# Altium PCB PCB1.PcbDoc
Units mm, origin at the board's own origin, x right, y up, seen from the top; angles counter-clockwise.
Board outline 85 x 63 mm, 2 copper layers (Top Layer, Bottom Layer), stack 0.98 mm thick; 56 components, 26 nets, 148 pads, 24 vias.
Unrouted connection lines stored in the file: 4.
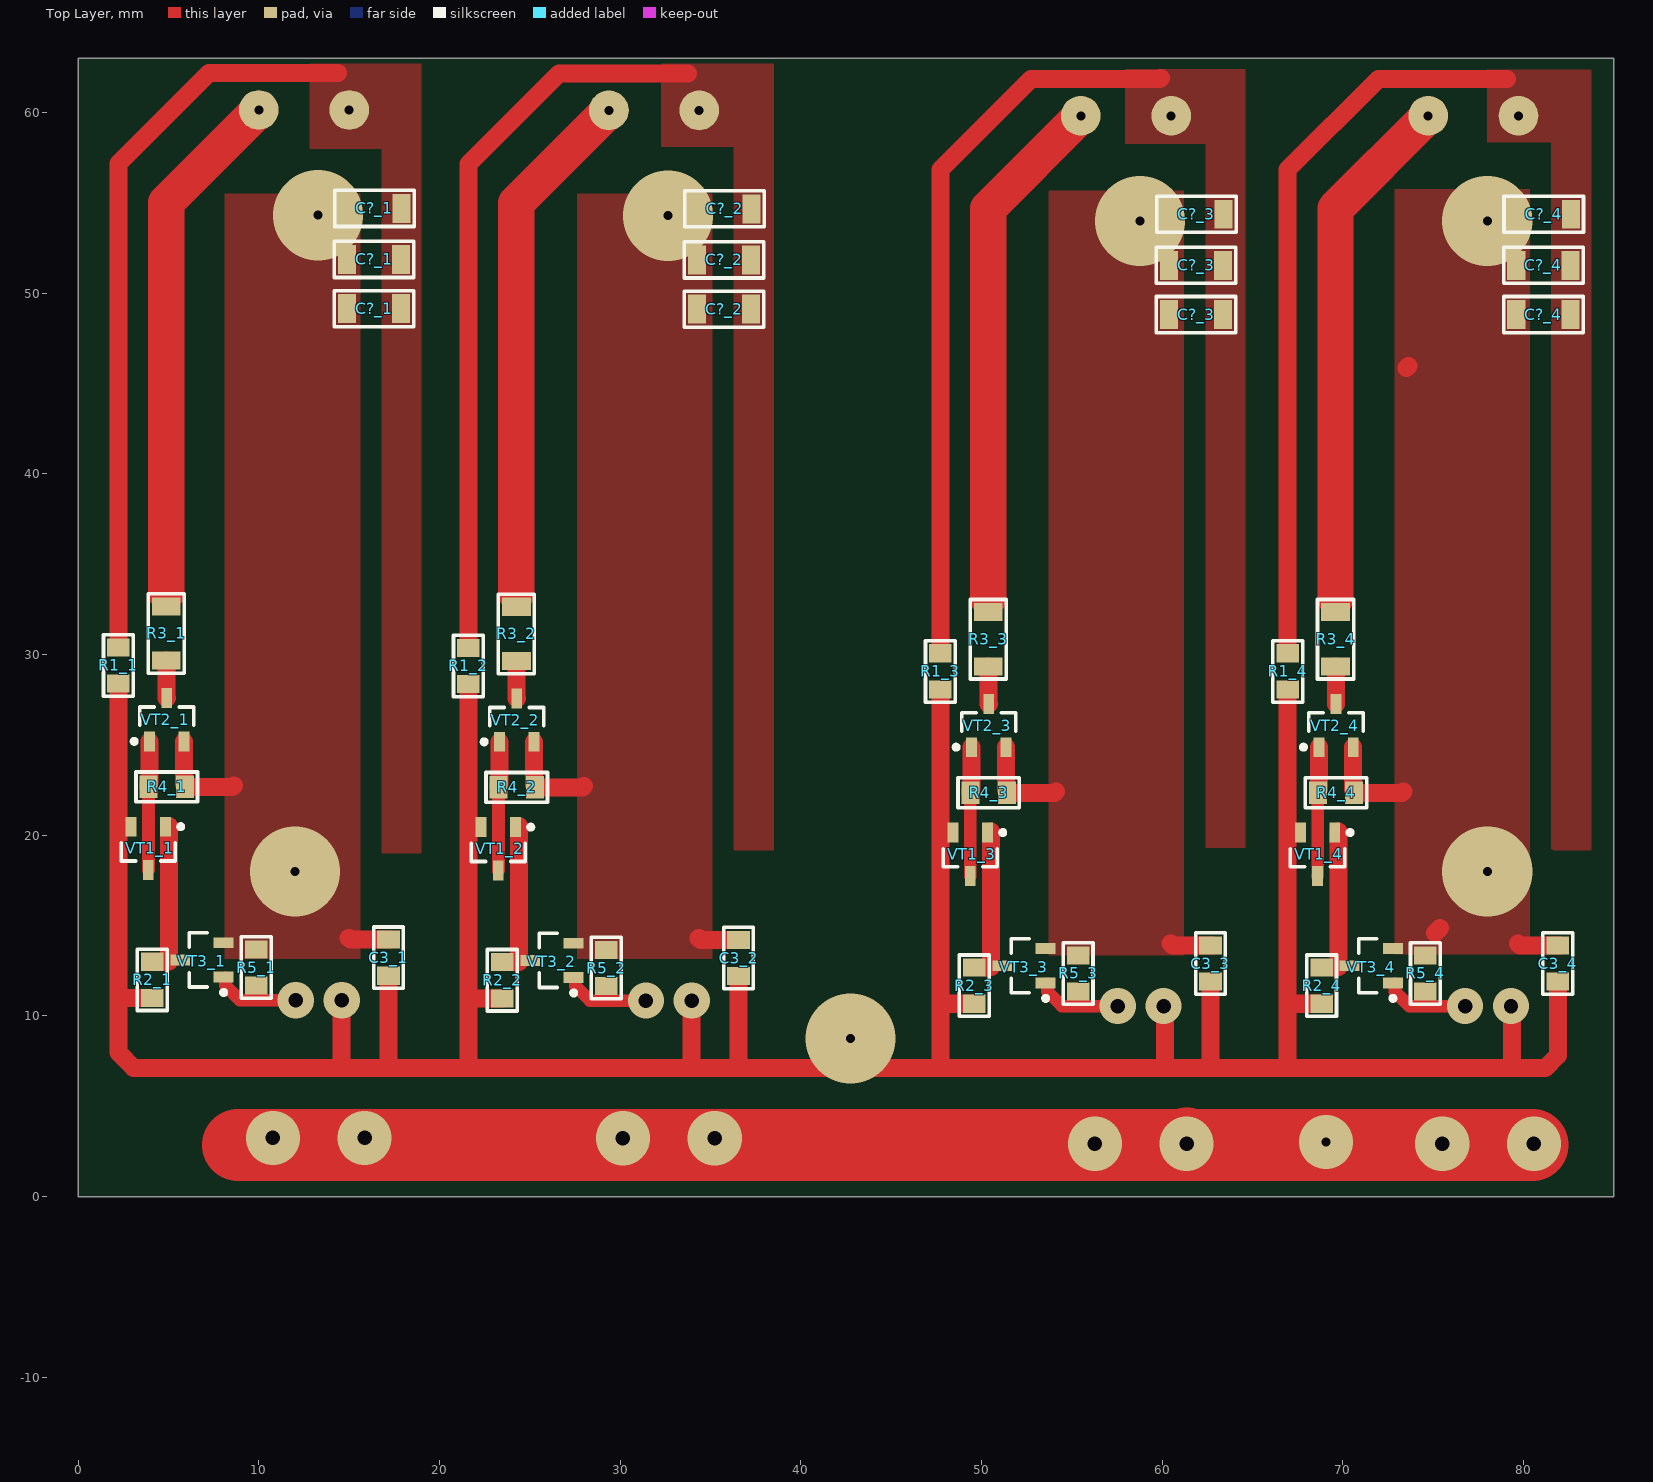
[diagram p0: Top Layer view]
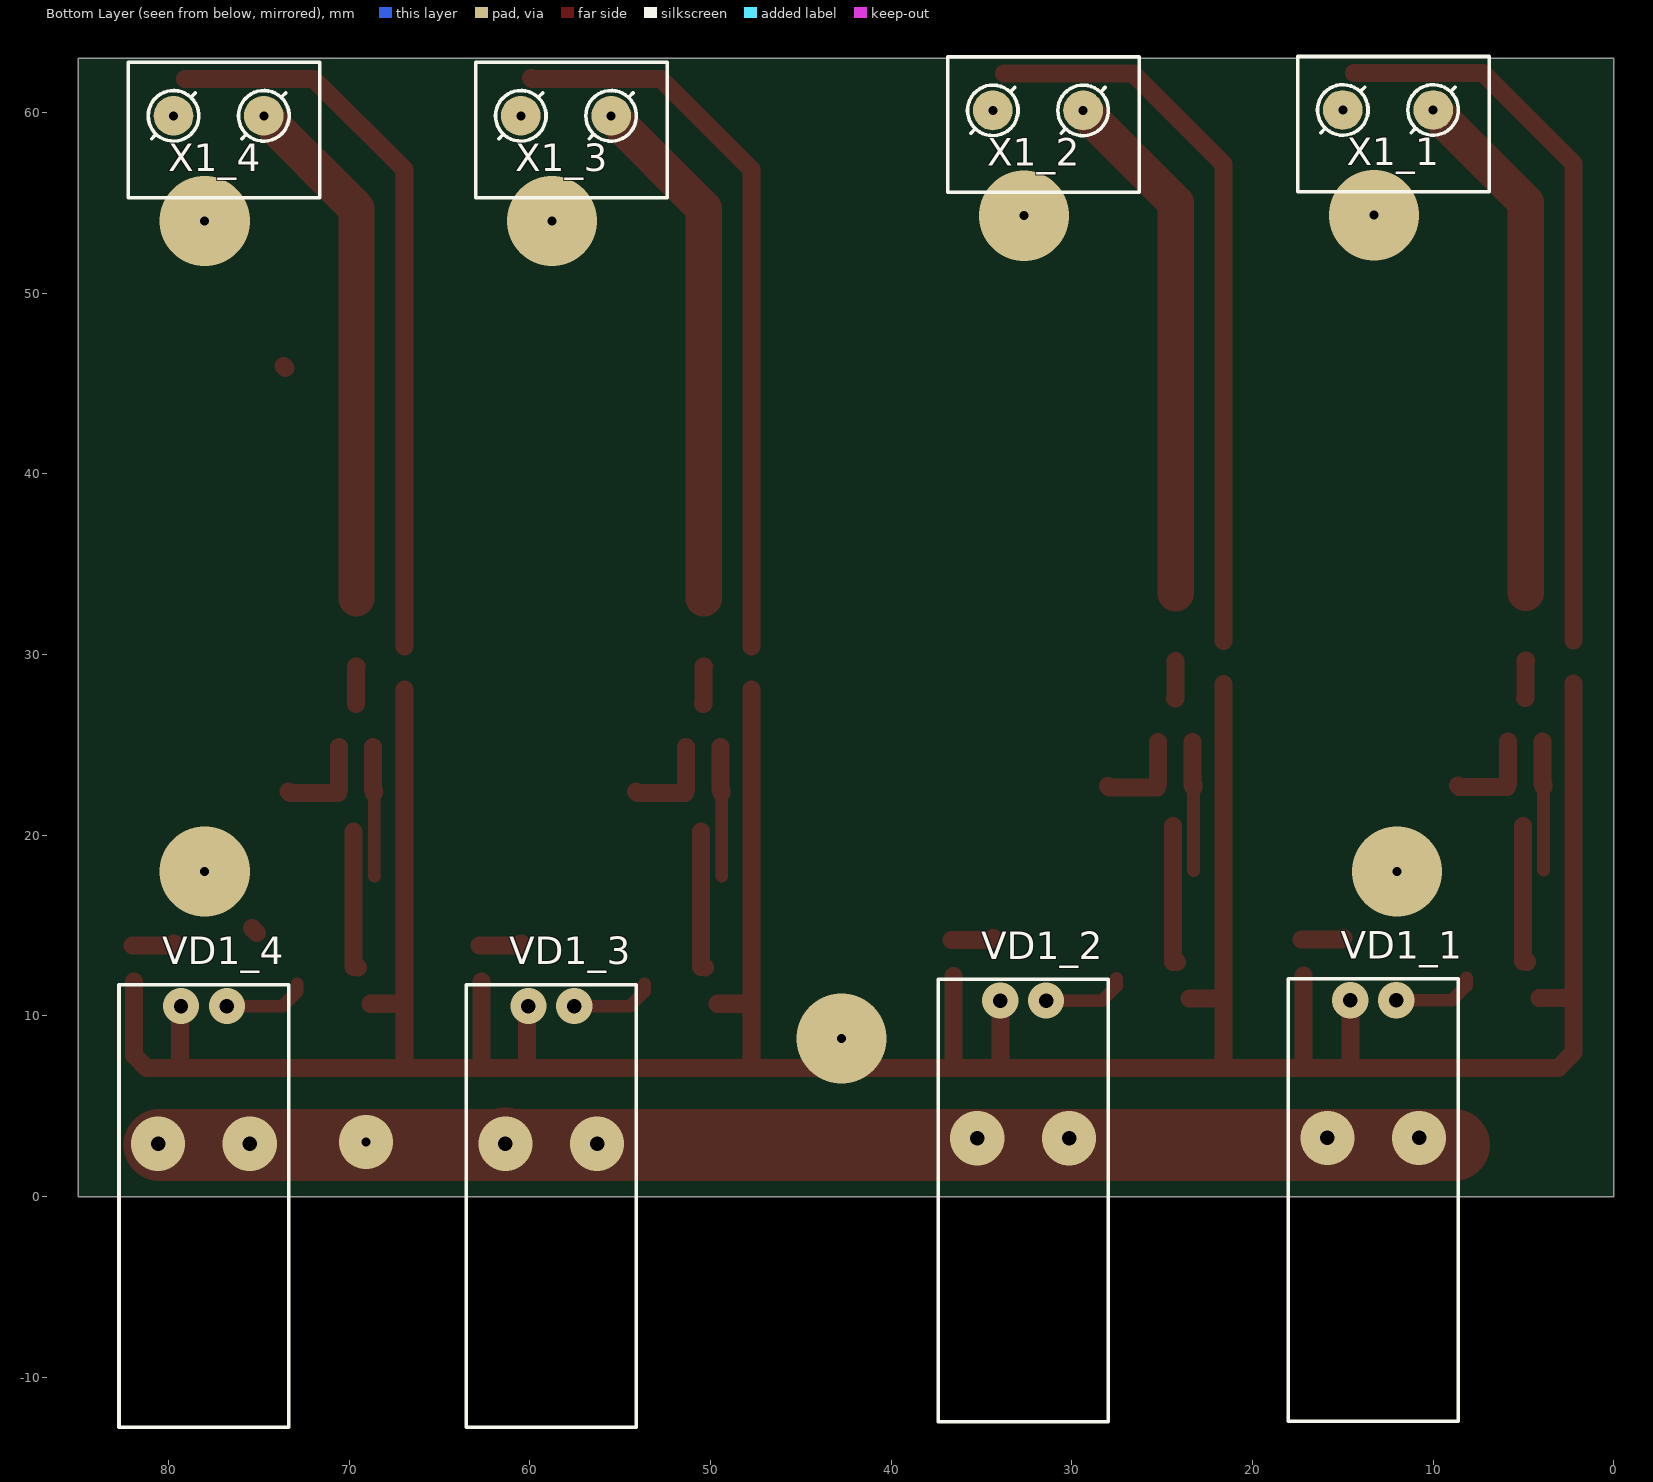
[diagram p1: Bottom Layer view, seen from below]
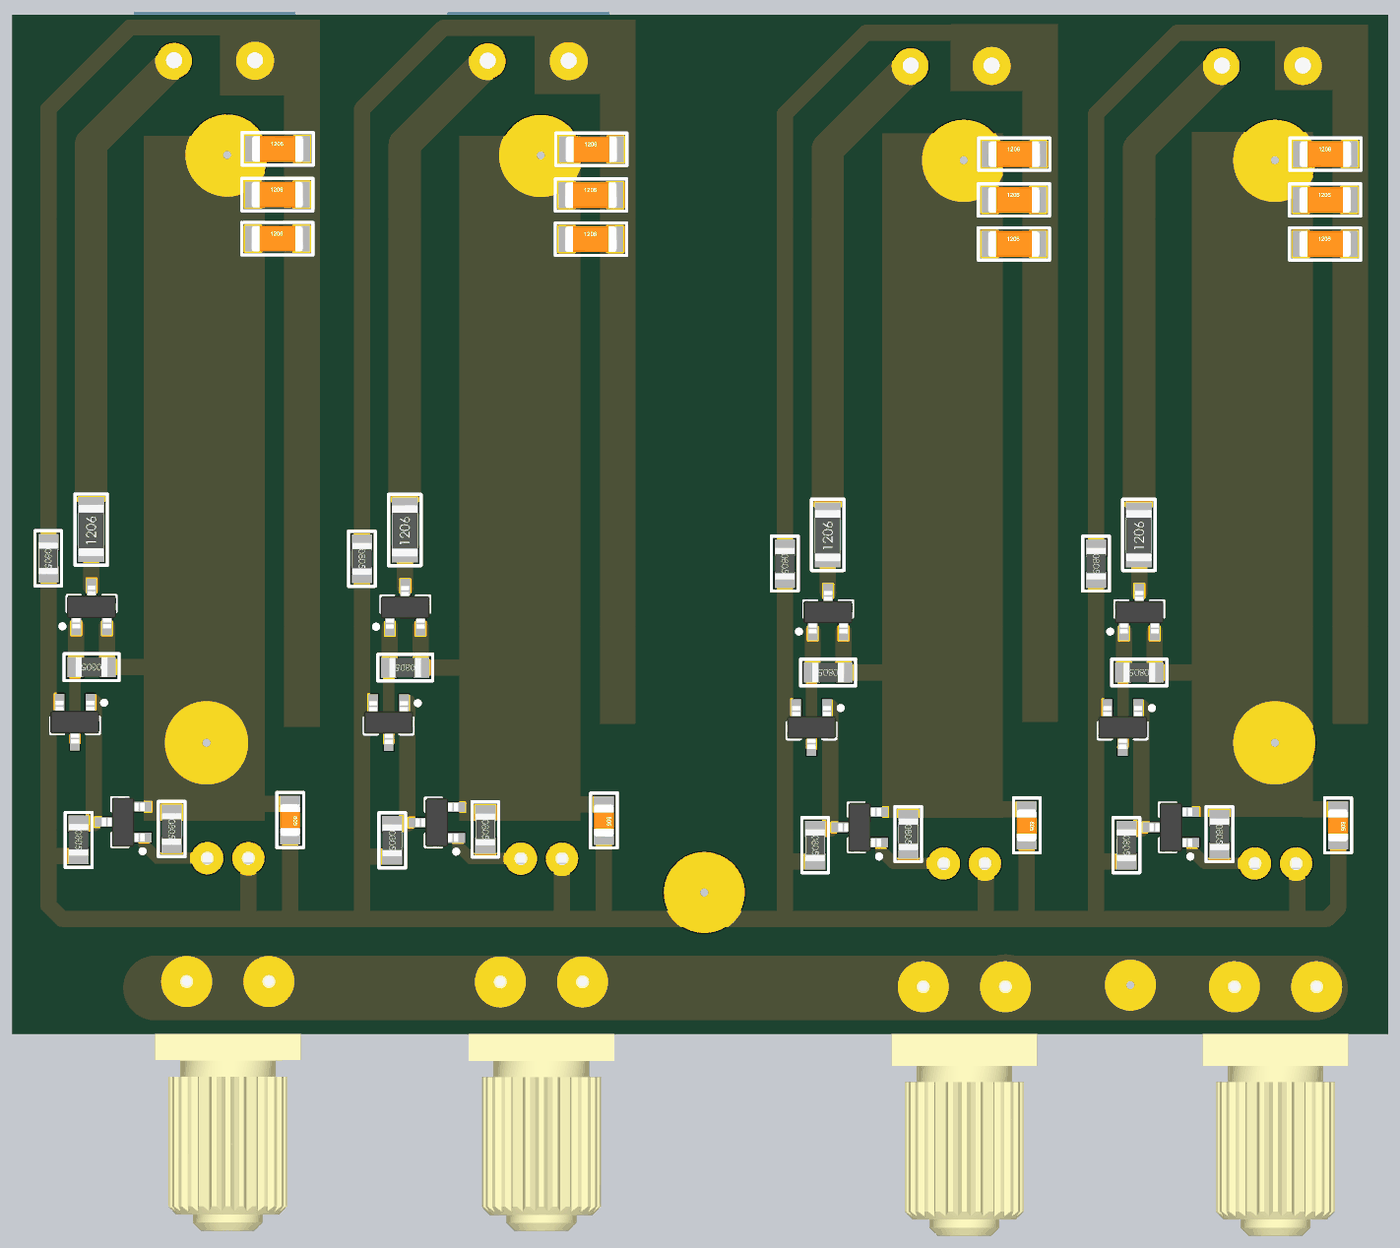
[diagram p2: 3D render of the assembled board from above, using the file's embedded part models]
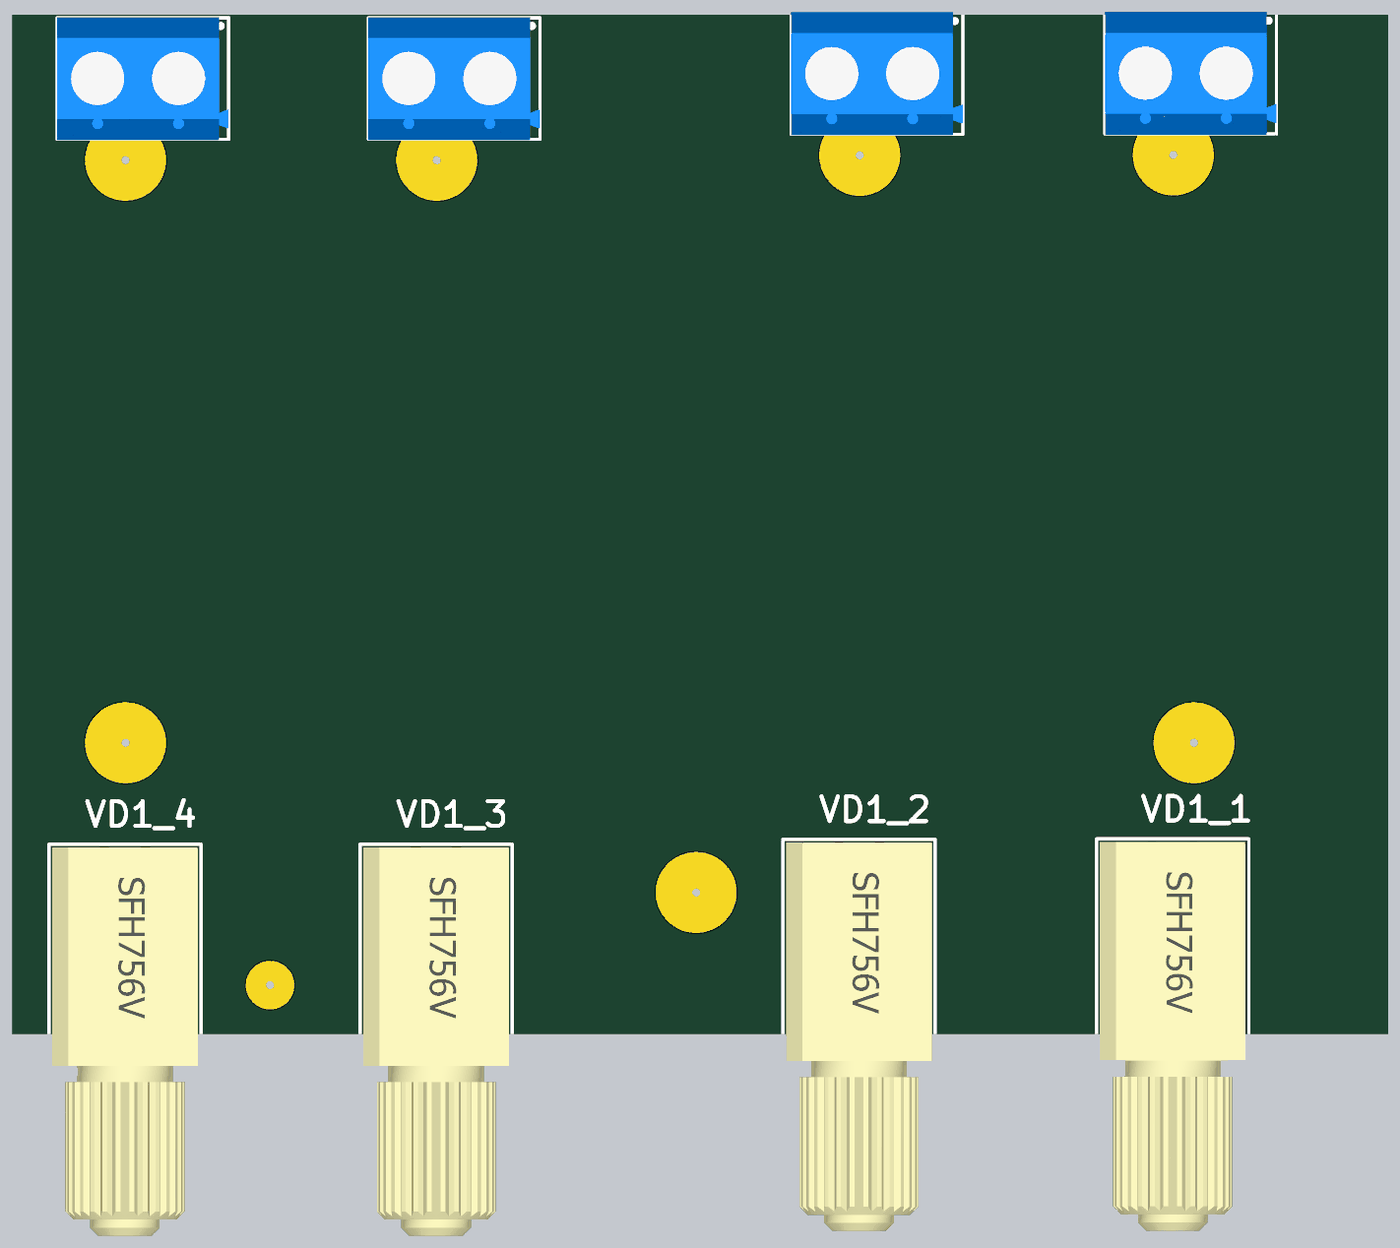
[diagram p3: 3D render of the assembled board from below, using the file's embedded part models]

## Layer stack, top to bottom
Top Solder: solder mask 0.0102, Solder Resist, Dk 3.5
Top Layer: signal copper 0.0356
Dielectric 1: dielectric 0.909, FR-4, Dk 4.8
Bottom Layer: signal copper 0.0356
Bottom Solder: solder mask 0.0102, Solder Resist, Dk 3.5

## Board outline
0,0 85,0 85,63 0,63

## Design rules (kind name [scope] priority, off if disabled: settings)
BoardOutlineClearance [All] p1: gap=0.3 ignorepadtopadclearanceinfootprint=FALSE
Clearance Clearance_MultiLayerPad [OnLayer('Multi-Layer') and IsPad] p1: gap=0.3 ignorepadtopadclearanceinfootprint=FALSE except(0: Arc-Hole Track-Hole SMDPad-Hole THPad-Hole Via-Hole Fill-Hole Poly-Hole Region-Hole Text-Hole)
Clearance Clearance_Polygon [InPolygon] p2: gap=0.2 ignorepadtopadclearanceinfootprint=FALSE except(0: Arc-Hole Track-Hole SMDPad-Hole THPad-Hole Via-Hole Fill-Hole Poly-Hole Region-Hole Text-Hole; 0.3: Arc-Poly Arc-Region Track-Poly Track-Region SMDPad-Poly SMDPad-Region THPad-Poly THPad-Region Via-Poly Via-Region Fill-Poly Fill-Region Poly-Poly Poly-Region Region-Region)
Clearance [All] p3: gap=0.2 ignorepadtopadclearanceinfootprint=FALSE except(0: Arc-Hole Track-Hole SMDPad-Hole THPad-Hole Via-Hole Fill-Hole Poly-Hole Region-Hole Text-Hole)
ComponentClearance [All] p1: gap=0.5 collisioncheckmode=3 verticalgap=0.5 showdistances=FALSE
DiffPairsRouting [All] p1: maxlimit=0.4 minlimit=0.2 mostfreqgap=0.2 toplayer_minwidth=0.2 toplayer_maxwidth=0.3 toplayer_prefwidth=0.2 bottomlayer_minwidth=0.2 bottomlayer_maxwidth=0.3 bottomlayer_prefwidth=0.2 maxuncoupledlength=12.7
Height [All] p1: minheight=0 maxheight=50 prefheight=12.7
HoleSize [All] p1: absolutevalues=TRUE maxlimit=10 minlimit=0.2 maxpercent=80.000 minpercent=20.000
HoleToHoleClearance [All] p1: gap=0.3 allowstackedmicrovias=TRUE
MinimumSolderMaskSliver [All] p1: minsoldermaskwidth=0.2
PlaneClearance [All] p1: clearance=0.5
PlaneConnect [All] p1: planeconnectstyle=Direct reliefexpansion=0.5 reliefentries=4 reliefconductorwidth=0.5 reliefairgap=0.3
PolygonConnect PolygonConnect_PadGND [InNet('GND') and IsPad] p1: connectstyle=Direct reliefconductorwidth=0.5 reliefentries=4 polygonreliefangle="90 Angle" airgapwidth=0.3
PolygonConnect PolygonConnect_Via [IsVia] p2: connectstyle=Direct reliefconductorwidth=0.254 reliefentries=4 polygonreliefangle="90 Angle" airgapwidth=0.254
PolygonConnect [All] p3: connectstyle=Direct reliefconductorwidth=0.5 reliefentries=4 polygonreliefangle="90 Angle" airgapwidth=0.3
RoomDefinition 4 [InComponentClass('4')] p1: confinementstyle=ConfineIn formatcopy=TRUE lockcomponents=FALSE outline 65.674,-21.5 84.225,-21.5 84.225,63.025 65.674,63.025
RoomDefinition 1 [InComponentClass('1')] p2: confinementstyle=ConfineIn formatcopy=TRUE lockcomponents=FALSE outline 0.949,-21.175 19.5,-21.175 19.5,63.35 0.949,63.35
RoomDefinition 2 [InComponentClass('2')] p3: confinementstyle=ConfineIn formatcopy=TRUE lockcomponents=FALSE outline 20.324,-21.2 38.875,-21.2 38.875,63.325 20.324,63.325
RoomDefinition 3 [InComponentClass('3')] p4: confinementstyle=ConfineIn formatcopy=TRUE lockcomponents=FALSE outline 46.449,-21.5 65,-21.5 65,63.025 46.449,63.025
RoutingTopology [All] p1: topology=Vertical
RoutingVias [All] p1: holewidth=0.2 width=0.4 viastyle="Through Hole" minholewidth=0.2 minwidth=0.4 maxholewidth=0.5 maxwidth=1.2
SilkToSolderMaskClearance [IsPad] p1: minsilkscreentomaskgap=0.2 clearancetoexposedcopper=TRUE
SolderMaskExpansion [All] p1: expansion=0.075 istentingtop=FALSE
Width [All] p1: maxlimit=10 minlimit=0.2 preferedwidth=0.2
20 further rules are at their usual default settings.

## Classes and differential pairs
channel class Sheet1: 1 2 3 4
component class 3: C3_3 C?_3 R1_3 R2_3 R3_3 R4_3 R5_3 VD1_3 VT2_3 VT3_3 X1_3
component class 2: C3_2 C?_2 R1_2 R2_2 R3_2 R4_2 R5_2 VD1_2 VT1_2 VT2_2 VT3_2 X1_2
component class 1: C3_1 C?_1 R1_1 R2_1 R3_1 R4_1 R5_1 VD1_1 VT1_1 VT2_1 VT3_1 X1_1
component class 4: C3_4 C?_4 R1_4 R2_4 R3_4 R4_4 R5_4 VD1_4 VT1_4 VT2_4 VT3_4 X1_4

## Components (designator, comment, footprint, x,y, rotation, side; value= is the part's Value field where it differs from the comment)
C3_1 "Ceramic capacitor, 0.1μF, X7R, ±10%, 16V, 0805, -55...+125°C" "CAP: 0805" 17.175,13.225 r270 top value=0.1μF (schematic designator C3)
C3_2 "Ceramic capacitor, 0.1μF, X7R, ±10%, 16V, 0805, -55...+125°C" "CAP: 0805" 36.55,13.2 r270 top value=0.1μF (schematic designator C3)
C3_3 "Ceramic capacitor, 0.1μF, X7R, ±10%, 16V, 0805, -55...+125°C" "CAP: 0805" 62.675,12.9 r270 top value=0.1μF (schematic designator C3)
C3_4 "Ceramic capacitor, 0.1μF, X7R, ±10%, 16V, 0805, -55...+125°C" "CAP: 0805" 81.9,12.9 r270 top value=0.1μF (schematic designator C3)
C?_1 "Ceramic capacitor, 2.2μF, X7R, ±10%, 16V, 1206, -55...+125°C" "CAP: 1206" 16.375,51.875 r0 top value=2.2μF (schematic designator C?)
C?_1 "Ceramic capacitor, 2.2μF, X7R, ±10%, 16V, 1206, -55...+125°C" "CAP: 1206" 16.375,49.15 r0 top value=2.2μF (schematic designator C?)
C?_1 "Ceramic capacitor, 2.2μF, X7R, ±10%, 16V, 1206, -55...+125°C" "CAP: 1206" 16.4,54.7 r0 top value=2.2μF (schematic designator C?)
C?_2 "Ceramic capacitor, 2.2μF, X7R, ±10%, 16V, 1206, -55...+125°C" "CAP: 1206" 35.75,49.125 r0 top value=2.2μF (schematic designator C?)
C?_2 "Ceramic capacitor, 2.2μF, X7R, ±10%, 16V, 1206, -55...+125°C" "CAP: 1206" 35.775,54.675 r0 top value=2.2μF (schematic designator C?)
C?_2 "Ceramic capacitor, 2.2μF, X7R, ±10%, 16V, 1206, -55...+125°C" "CAP: 1206" 35.75,51.85 r0 top value=2.2μF (schematic designator C?)
C?_3 "Ceramic capacitor, 2.2μF, X7R, ±10%, 16V, 1206, -55...+125°C" "CAP: 1206" 61.875,51.55 r0 top value=2.2μF (schematic designator C?)
C?_3 "Ceramic capacitor, 2.2μF, X7R, ±10%, 16V, 1206, -55...+125°C" "CAP: 1206" 61.875,48.825 r0 top value=2.2μF (schematic designator C?)
C?_3 "Ceramic capacitor, 2.2μF, X7R, ±10%, 16V, 1206, -55...+125°C" "CAP: 1206" 61.9,54.375 r0 top value=2.2μF (schematic designator C?)
C?_4 "Ceramic capacitor, 2.2μF, X7R, ±10%, 16V, 1206, -55...+125°C" "CAP: 1206" 81.1,51.55 r0 top value=2.2μF (schematic designator C?)
C?_4 "Ceramic capacitor, 2.2μF, X7R, ±10%, 16V, 1206, -55...+125°C" "CAP: 1206" 81.125,54.375 r0 top value=2.2μF (schematic designator C?)
C?_4 "Ceramic capacitor, 2.2μF, X7R, ±10%, 16V, 1206, -55...+125°C" "CAP: 1206" 81.1,48.825 r0 top value=2.2μF (schematic designator C?)
R1_1 "Resistor film, 510, ±5%, 0805, 0.125W, -55...+125°C" "RES: 0805" 2.225,29.4 r270 top value=510 (schematic designator R1)
R1_2 "Resistor film, 510, ±5%, 0805, 0.125W, -55...+125°C" "RES: 0805" 21.6,29.375 r270 top value=510 (schematic designator R1)
R1_3 "Resistor film, 510, ±5%, 0805, 0.125W, -55...+125°C" "RES: 0805" 47.725,29.075 r270 top value=510 (schematic designator R1)
R1_4 "Resistor film, 510, ±5%, 0805, 0.125W, -55...+125°C" "RES: 0805" 66.95,29.075 r270 top value=510 (schematic designator R1)
R2_1 "Resistor film, 4k7, ±5%, 0805, 0.125W, -55...+125°C" "RES: 0805" 4.1,12 r270 top value=4k7 (schematic designator R2)
R2_2 "Resistor film, 4k7, ±5%, 0805, 0.125W, -55...+125°C" "RES: 0805" 23.475,11.975 r270 top value=4k7 (schematic designator R2)
R2_3 "Resistor film, 4k7, ±5%, 0805, 0.125W, -55...+125°C" "RES: 0805" 49.6,11.675 r270 top value=4k7 (schematic designator R2)
R2_4 "Resistor film, 4k7, ±5%, 0805, 0.125W, -55...+125°C" "RES: 0805" 68.825,11.675 r270 top value=4k7 (schematic designator R2)
R3_1 "Resistor film, 5R6, ±5%, 1206, 0.25W, -55...+125°C" "RES: 1206" 4.875,31.175 r90 top value=5R6 (schematic designator R3)
R3_2 "Resistor film, 5R6, ±5%, 1206, 0.25W, -55...+125°C" "RES: 1206" 24.25,31.15 r90 top value=5R6 (schematic designator R3)
R3_3 "Resistor film, 5R6, ±5%, 1206, 0.25W, -55...+125°C" "RES: 1206" 50.375,30.85 r90 top value=5R6 (schematic designator R3)
R3_4 "Resistor film, 5R6, ±5%, 1206, 0.25W, -55...+125°C" "RES: 1206" 69.6,30.85 r90 top value=5R6 (schematic designator R3)
R4_1 "Resistor film, 470, ±5%, 0805, 0.125W, -55...+125°C" "RES: 0805" 4.9,22.675 r180 top value=470 (schematic designator R4)
R4_2 "Resistor film, 470, ±5%, 0805, 0.125W, -55...+125°C" "RES: 0805" 24.275,22.65 r180 top value=470 (schematic designator R4)
R4_3 "Resistor film, 470, ±5%, 0805, 0.125W, -55...+125°C" "RES: 0805" 50.4,22.35 r180 top value=470 (schematic designator R4)
R4_4 "Resistor film, 470, ±5%, 0805, 0.125W, -55...+125°C" "RES: 0805" 69.625,22.35 r180 top value=470 (schematic designator R4)
R5_1 "Resistor film, 20k, ±5%, 0805, 0.125W, -55...+125°C" "RES: 0805" 9.85,12.675 r270 top value=20k (schematic designator R5)
R5_2 "Resistor film, 20k, ±5%, 0805, 0.125W, -55...+125°C" "RES: 0805" 29.225,12.65 r270 top value=20k (schematic designator R5)
R5_3 "Resistor film, 20k, ±5%, 0805, 0.125W, -55...+125°C" "RES: 0805" 55.35,12.35 r270 top value=20k (schematic designator R5)
R5_4 "Resistor film, 20k, ±5%, 0805, 0.125W, -55...+125°C" "RES: 0805" 74.575,12.35 r270 top value=20k (schematic designator R5)
VD1_1 "SHF250" "LED: SFH757" 13.315,7.06 r180 bottom (schematic designator VD1)
VD1_2 "SHF250" "LED: SFH757" 32.69,7.035 r180 bottom (schematic designator VD1)
VD1_3 "SHF250" "LED: SFH757" 58.815,6.735 r180 bottom (schematic designator VD1)
VD1_4 "SHF250" "LED: SFH757" 78.04,6.735 r180 bottom (schematic designator VD1)
VT1_1 "MOSFET P-channel transistor, 20V, 2.6A, 2.9nC, 2.5W, 135mOhm, 220pF, SOT-23, -55...+150°C" SOT23 3.875,19.275 r270 top (schematic designator VT1)
VT1_2 "MOSFET P-channel transistor, 20V, 2.6A, 2.9nC, 2.5W, 135mOhm, 220pF, SOT-23, -55...+150°C" SOT23 23.25,19.25 r270 top (schematic designator VT1)
VT1_3 "MOSFET P-channel transistor, 20V, 2.6A, 2.9nC, 2.5W, 135mOhm, 220pF, SOT-23, -55...+150°C" SOT23 49.375,18.95 r270 top (schematic designator VT1)
VT1_4 "MOSFET P-channel transistor, 20V, 2.6A, 2.9nC, 2.5W, 135mOhm, 220pF, SOT-23, -55...+150°C" SOT23 68.6,18.95 r270 top (schematic designator VT1)
VT2_1 "MOSFET N-channel transistor, 80V, 7A, 9.1nC, 2.5W, 34mOhm, 756pF, 8-TDSON, -55...+150°C" SOT23 4.9,26.4 r90 top (schematic designator VT2)
VT2_2 "MOSFET N-channel transistor, 80V, 7A, 9.1nC, 2.5W, 34mOhm, 756pF, 8-TDSON, -55...+150°C" SOT23 24.275,26.375 r90 top (schematic designator VT2)
VT2_3 "MOSFET N-channel transistor, 80V, 7A, 9.1nC, 2.5W, 34mOhm, 756pF, 8-TDSON, -55...+150°C" SOT23 50.4,26.075 r90 top (schematic designator VT2)
VT2_4 "MOSFET N-channel transistor, 80V, 7A, 9.1nC, 2.5W, 34mOhm, 756pF, 8-TDSON, -55...+150°C" SOT23 69.625,26.075 r90 top (schematic designator VT2)
VT3_1 "NPN transistor, 45V, 100mA, 100MHz, 300mW, 0.6V, 420, SOT-23, -55...+125°C" SOT23 6.85,13.1 r180 top (schematic designator VT3)
VT3_2 "NPN transistor, 45V, 100mA, 100MHz, 300mW, 0.6V, 420, SOT-23, -55...+125°C" SOT23 26.225,13.075 r180 top (schematic designator VT3)
VT3_3 "NPN transistor, 45V, 100mA, 100MHz, 300mW, 0.6V, 420, SOT-23, -55...+125°C" SOT23 52.35,12.775 r180 top (schematic designator VT3)
VT3_4 "NPN transistor, 45V, 100mA, 100MHz, 300mW, 0.6V, 420, SOT-23, -55...+125°C" SOT23 71.575,12.775 r180 top (schematic designator VT3)
X1_1 "Terminal connector, 2pin, 3.5mm, 300VAC, 10A" "CON: KF301-5.0-2P" 12.275,59.325 r0 bottom (schematic designator X1)
X1_2 "Terminal connector, 2pin, 3.5mm, 300VAC, 10A" "CON: KF301-5.0-2P" 31.65,59.3 r0 bottom (schematic designator X1)
X1_3 "Terminal connector, 2pin, 3.5mm, 300VAC, 10A" "CON: KF301-5.0-2P" 57.775,59 r0 bottom (schematic designator X1)
X1_4 "Terminal connector, 2pin, 3.5mm, 300VAC, 10A" "CON: KF301-5.0-2P" 77,59 r0 bottom (schematic designator X1)

## Footprints (in the part's own frame and the unit in brackets; to place one, negate y for a bottom-side part, rotate by r counter-clockwise, add the part's x,y. Pads: shape width x height; smd on the part's side, far side on the other; paste and mask are expansions set on the pad)
"CAP: 0805" [mm]
  rect 1x1.25 smd: 1(-1,0) 2(1,0)
  silkscreen extent -1.7,-0.82 1.7,0.82, body extent -1,-0.62 1,0.63, height 0.78
"CAP: 1206" [mm]
  rect 1x1.6 smd: 1(-1.5,0) 2(1.5,0)
  silkscreen extent -2.2,-1 2.2,1, body extent -1.6,-0.8 1.6,0.8, height 1
"CON: KF301-5.0-2P" [mm]
  round 2.2 hole 0.5: 1(2.725,-0.825) 2(-2.275,-0.825)
  round 0.5 on Bottom Overlay: ""(-4.875,-3.3)
  silkscreen extent -5.38,-3.8 5.23,3.7, body extent -5.37,-3.85 5.23,3.75, height 10
"LED: SFH757" [mil]
  round 60 hole 19.68: 1(50,150) 2(-50,150) 3(-100,-150) 4(100,-150)
  silkscreen extent -185,-768 185,197, body extent -177,-756 177,189, height 390
"RES: 0805" [mm]
  rect 1x1.25 smd: 1(-1,0) 2(1,0)
  silkscreen extent -1.7,-0.82 1.7,0.82, body extent -1,-0.6 1,0.6, height 0.44
"RES: 1206" [mm]
  rect 1x1.6 smd: 1(-1.5,0) 2(1.5,0)
  silkscreen extent -2.2,-1 2.2,1, body extent -1.65,-0.8 1.55,0.8, height 0.47
SOT23 [mm]
  rect 1.1x0.6 smd: 1(-1.2,0.95) 2(-1.2,-0.95) 3(1.2,0)
  round 0.5 on Mech1: ""(-0.9,1.1)
  silkscreen extent -1.32,-1.5 0.7,1.92, body extent -1.32,-1.52 1.32,1.52, height 1.12

## Part data
C3_1 C3_2 C3_3 C3_4: library part Ceramic_0805, Manufacturer=Yageo, Package=0805, PartNumber=CC0805KRX7R7BB104, Temperature=-55...+125°C, Tolerance=±10%, TypeCapacitor="Ceramic capacitor", TypeDielectric=X7R, Voltage=16V, HelpURL=https://www.digikey.com/product-detail/en/yageo/CC0805KRX7R7BB104/311-1142-1-ND/303052, ValueManufacturerPartNumber="Ceramic capacitor, 0.1μF, X7R, ±10%, 16V, 0805, -55...+125°C"
C?_1 C?_1 C?_1 C?_2 C?_2 C?_2 C?_3 C?_3 C?_3 C?_4 C?_4 C?_4: library part Ceramic_1206, Manufacturer=Yageo, Package=1206, PartNumber=CC1206KRX7R9BB104, Temperature=-55...+125°C, Tolerance=±10%, TypeCapacitor="Ceramic capacitor", TypeDielectric=X7R, Voltage=16V, HelpURL=https://www.digikey.com/product-detail/en/yageo/CC1206KRX7R9BB104/311-1179-1-ND/303089, ValueManufacturerPartNumber="Ceramic capacitor, 2.2μF, X7R, ±10%, 16V, 1206, -55...+125°C"
R1_1 R1_2 R1_3 R1_4 R2_1 R2_2 R2_3 R2_4 R4_1 R4_2 R4_3 R4_4 R5_1 R5_2 R5_3 R5_4: library part Resistor_0805, Manufacturer=Yageo, Package=0805, PartNumber=RC0805JR-07100RL, Power=0.125W, Temperature=-55...+125°C, Tolerance=±5%, TypeResistor="Resistor film", HelpURL=https://www.digikey.com/product-detail/en/yageo/RC0805JR-07100RL/311-100ARCT-ND/731185
  R1_1 R1_2 R1_3 R1_4: ValueManufacturerPartNumber="Resistor film, 510, ±5%, 0805, 0.125W, -55...+125°C"
  R2_1 R2_2 R2_3 R2_4: ValueManufacturerPartNumber="Resistor film, 4k7, ±5%, 0805, 0.125W, -55...+125°C"
  R4_1 R4_2 R4_3 R4_4: ValueManufacturerPartNumber="Resistor film, 470, ±5%, 0805, 0.125W, -55...+125°C"
  R5_1 R5_2 R5_3 R5_4: ValueManufacturerPartNumber="Resistor film, 20k, ±5%, 0805, 0.125W, -55...+125°C"
R3_1 R3_2 R3_3 R3_4: library part Resistor_1206, Manufacturer=Yageo, Package=1206, PartNumber=RC1206JR-07100RL, Power=0.25W, Temperature=-55...+125°C, Tolerance=±5%, TypeResistor="Resistor film", HelpURL=https://www.digikey.com/product-detail/en/yageo/RC1206JR-07100RL/311-100ERCT-ND/732153, ValueManufacturerPartNumber="Resistor film, 5R6, ±5%, 1206, 0.25W, -55...+125°C"
VT1_1 VT1_2 VT1_3 VT1_4: library part MOSFET_P_132, CurrentDS=2.6A, InputCapacitor=220pF, Manufacturer="Infineon Technologies", MaxPower=2.5W, Package=SOT-23, PartNumber=BSS84, Temperature=-55...+150°C, VoltageDS=20V, GateCharge=2.9nC, HelpURL=https://www.digikey.com/product-detail/en/infineon-technologies/IRLML2246TRPBF/IRLML2246TRPBFCT-ND/2639576, RDS=135mOhm, TypeTransistor="MOSFET P-channel transistor", ValueManufacturerPartNumber="MOSFET P-channel transistor, 20V, 2.6A, 2.9nC, 2.5W, 135mOhm, 220pF, SOT-23, -55...+150°C"
VT2_1 VT2_2 VT2_3 VT2_4: library part MOSFET_N_132, CurrentDS=7A, InputCapacitor=756pF, Manufacturer="Infineon Technologies", MaxPower=2.5W, Package=8-TDSON, PartNumber=IRLML2803, Temperature=-55...+150°C, VoltageDS=80V, GateCharge=9.1nC, HelpURL=https://www.digikey.com/product-detail/en/infineon-technologies/BSC340N08NS3GATMA1/BSC340N08NS3GATMA1TR-ND/2080655, RDS=34mOhm, TypeTransistor="MOSFET N-channel transistor", ValueManufacturerPartNumber="MOSFET N-channel transistor, 80V, 7A, 9.1nC, 2.5W, 34mOhm, 756pF, 8-TDSON, -55...+150°C"
VT3_1 VT3_2 VT3_3 VT3_4: library part BJT_NPN_132, CurrentCE=100mA, CurrentGain=420, Frequency=100MHz, Manufacturer="ON Semiconductor", MaxPower=300mW, Package=SOT-23, PartNumber=PMBT2369, Temperature=-55...+125°C, VoltageCE=45V, VoltageSaturation=0.6V, HelpURL=https://www.digikey.com/product-detail/en/on-semiconductor/BC847CLT1G/BC847CLT1GOSCT-ND/917836, TypeTransistor="NPN transistor", ValueManufacturerPartNumber="NPN transistor, 45V, 100mA, 100MHz, 300mW, 0.6V, 420, SOT-23, -55...+125°C"
X1_1 X1_2 X1_3 X1_4: library part Connector_terminal_2pin, CurrentMax=10A, Manufacturer=Degson, PartNumber=DG350-3.5-02P-14, VoltageMax=300VAC, CommentText="\"Разъем\"", HelpURL=https://www.chipdip.ru/product/dg350-3.5-02p-12, Multichannel=2pin, Pitch=3.5mm, TypeConnector="Terminal connector", ValueManufacturerPartNumber="Terminal connector, 2pin, 3.5mm, 300VAC, 10A"

## Via types
v1: diameter 3, hole 0.8, Top Layer to Bottom Layer, 8 vias
v2: diameter 2, hole 0.8, Top Layer to Bottom Layer, 8 vias
v3: diameter 5, hole 0.5, Top Layer to Bottom Layer, 7 vias
v4: diameter 3, hole 0.5, Top Layer to Bottom Layer, 1 vias

## Nets (pads, with @x,y where several pads share a name; then routed paths per layer and width w, separated by ;. In a path a pad name is that pad's centre, name@x,y a point inside that pad or via, vN(x,y) a via of type N, cw(c..) or ccw(c..) an arc to the next point about the centre after c; other vN are vias at no path point)
GND: C3_1.1 C3_2.1 C3_3.1 C3_4.1 C?_1.1 C?_2.1 C?_3.1 C?_4.1 R4_1.1 R4_2.1 R4_3.1 R4_4.1 R5_1.1 R5_2.1 R5_3.1 R5_4.1 VD1_1.3 VD1_1.4 VD1_2.3 VD1_2.4 VD1_3.3 VD1_3.4 VD1_4.3 VD1_4.4 VT2_1.2 VT2_2.2 VT2_3.2 VT2_4.2 VT3_1.2 VT3_2.2 VT3_3.2 VT3_4.2 | length 102.9
  Top Layer w1: VT2_1.2 5.85,22.85 5.9,22.8 R4_1.1 8.55,22.675 8.625,22.75 ; 14.975,14.325 15.075,14.225 C3_1.1@17.275,14.225 ; VT2_2.2 25.225,22.825 25.275,22.775 R4_2.1 27.925,22.65 28,22.725 ; 34.35,14.3 34.45,14.2 C3_2.1@36.65,14.2 ; VT2_3.2 51.35,22.525 51.4,22.475 R4_3.1 54.05,22.35 54.125,22.425 ; 60.475,14 60.575,13.9 C3_3.1@62.775,13.9 ; VT2_4.2 70.575,22.525 70.625,22.475 R4_4.1 73.275,22.35 73.35,22.425 ; 73.525,45.875 73.625,45.975 ; 75.1,14.6 75.375,14.875 ; 79.7,14 79.8,13.9 C3_4.1@82,13.9
  Top Layer w4: 8.855,2.85 VD1_4.3@80.505,2.85 ; VD1_3.3@61.28,2.85 v1(61.355,2.925)
  other v1: 56.275,2.925 75.5,2.925 80.58,2.925 30.15,3.225 35.23,3.225 10.775,3.25 15.855,3.25
  other v3: 12,18 78,18 58.775,54 78,54 32.65,54.3 13.275,54.325
  other v4: 69.075,3.025
NetC?_1_2: C?_1.2 R1_1.1 X1_1.1 | length 40.6
  Top Layer w1: R1_1.1@2.225,30.775 2.225,57.175 7.25,62.2 14.375,62.2
NetC?_2_2: C?_2.2 R1_2.1 X1_2.1 | length 40.6
  Top Layer w1: R1_2.1@21.6,30.75 21.6,57.15 26.625,62.175 33.75,62.175
NetC?_3_2: C?_3.2 R1_3.1 X1_3.1 | length 40.7
  Top Layer w1: R1_3.1@47.725,30.45 47.725,56.85 52.75,61.875 59.875,61.875 59.925,61.925
NetC?_4_2: C?_4.2 R1_4.1 X1_4.1 | length 40.6
  Top Layer w1: R1_4.1@66.95,30.45 66.95,56.85 71.975,61.875 79.1,61.875
NetR2_1_1: R2_1.1 VT1_1.1 VT3_1.3 | length 7.5
  Top Layer w1: 4.8,13 4.825,13.025 ; 5.025,13.025 VT1_1.1@5.025,20.525
NetR2_2_1: R2_2.1 VT1_2.1 VT3_2.3 | length 7.5
  Top Layer w1: 24.175,12.975 24.2,13 ; 24.4,13 VT1_2.1@24.4,20.5
NetR2_3_1: R2_3.1 VT1_3.1 VT3_3.3 | length 7.5
  Top Layer w1: 50.3,12.675 50.325,12.7 ; 50.525,12.7 VT1_3.1@50.525,20.2
NetR2_4_1: R2_4.1 VT1_4.1 VT3_4.3 | length 7.5
  Top Layer w1: 69.525,12.675 69.55,12.7 ; 69.75,12.7 VT1_4.1@69.75,20.2
NetR3_1_1: R3_1.1 VT2_1.3 | length 2.1
  Top Layer w1: R3_1.1 4.887,29.675 4.887,27.612 VT2_1.3
NetR3_1_2: R3_1.2 X1_1.2 | length 28.8
  Top Layer w2: 4.875,33.425 4.875,55.025 X1_1.2
NetR3_2_1: R3_2.1 VT2_2.3 | length 2.1
  Top Layer w1: R3_2.1 24.262,29.65 24.262,27.587 VT2_2.3
NetR3_2_2: R3_2.2 X1_2.2 | length 28.8
  Top Layer w2: 24.25,33.4 24.25,55 X1_2.2
NetR3_3_1: R3_3.1 VT2_3.3 | length 2.1
  Top Layer w1: R3_3.1 50.387,29.35 50.387,27.287 VT2_3.3
NetR3_3_2: R3_3.2 X1_3.2 | length 28.8
  Top Layer w2: 50.375,33.1 50.375,54.7 X1_3.2
NetR3_4_1: R3_4.1 VT2_4.3 | length 2.1
  Top Layer w1: R3_4.1 69.612,29.35 69.612,27.287 VT2_4.3
NetR3_4_2: R3_4.2 X1_4.2 | length 28.8
  Top Layer w2: 69.6,33.1 69.6,54.7 X1_4.2
NetR4_1_2: R4_1.2 VT1_1.3 VT2_1.1 | length 7.2
  Top Layer w0.7: VT1_1.3 3.887,18.088 3.887,22.663 R4_1.2
  Top Layer w1: R4_1.2 3.9,22.8 3.95,22.85 VT2_1.1
NetR4_2_2: R4_2.2 VT1_2.3 VT2_2.1 | length 7.2
  Top Layer w0.7: VT1_2.3 23.262,18.063 23.262,22.638 R4_2.2
  Top Layer w1: R4_2.2 23.275,22.775 23.325,22.825 VT2_2.1
NetR4_3_2: R4_3.2 VT1_3.3 VT2_3.1 | length 7.2
  Top Layer w0.7: VT1_3.3 49.387,17.763 49.387,22.338 R4_3.2
  Top Layer w1: R4_3.2 49.4,22.475 49.45,22.525 VT2_3.1
NetR4_4_2: R4_4.2 VT1_4.3 VT2_4.1 | length 7.2
  Top Layer w0.7: VT1_4.3 68.612,17.763 68.612,22.338 R4_4.2
  Top Layer w1: R4_4.2 68.625,22.475 68.675,22.525 VT2_4.1
NetR5_1_2: R5_1.2 VD1_1.1 VT3_1.1 | length 4.7
  Top Layer w0.7: VT3_1.1@8.15,12.1 8.15,11.675 8.955,10.87 v2(12.045,10.87)
NetR5_2_2: R5_2.2 VD1_2.1 VT3_2.1 | length 4.7
  Top Layer w0.7: VT3_2.1@27.525,12.075 27.525,11.65 28.33,10.845 v2(31.42,10.845)
NetR5_3_2: R5_3.2 VD1_3.1 VT3_3.1 | length 4.7
  Top Layer w0.7: VT3_3.1@53.65,11.775 53.65,11.35 54.455,10.545 v2(57.545,10.545)
NetR5_4_2: R5_4.2 VD1_4.1 VT3_4.1 | length 4.7
  Top Layer w0.7: VT3_4.1@72.875,11.775 72.875,11.35 73.68,10.545 v2(76.77,10.545)
VCC: C3_1.2 C3_2.2 C3_3.2 C3_4.2 R1_1.2 R1_2.2 R1_3.2 R1_4.2 R2_1.2 R2_2.2 R2_3.2 R2_4.2 VD1_1.2 VD1_2.2 VD1_3.2 VD1_4.2 VT1_1.2 VT1_2.2 VT1_3.2 VT1_4.2 | length 205.2
  Top Layer w1: R1_1.2 2.225,10.95 ; R2_1.2 2.275,11 2.225,10.95 ; v2(14.585,10.87) 14.585,7.315 14.775,7.125 ; C3_1.2 17.175,7.325 17.375,7.125 ; R1_2.2 21.6,10.95 ; R2_2.2 21.625,10.975 21.6,10.95 ; v2(33.96,10.845) 33.96,7.26 33.825,7.125 ; C3_2.2 36.55,7.15 36.575,7.125 ; R1_3.2 47.725,10.65 ; R2_3.2 47.75,10.675 47.725,10.65 ; v2(60.085,10.545) 60.15,10.48 60.15,7.125 ; C3_3.2 62.675,7.15 62.65,7.125 ; R1_4.2 66.95,10.8 ; R2_4.2 67.075,10.675 66.95,10.8 ; v2(79.31,10.545) 79.375,10.48 79.375,7.125 ; C3_4.2 81.9,7.8 81.225,7.125 79.375,7.125 ; 2.225,10.95 2.225,7.975 3.075,7.125 14.775,7.125 ; 14.775,7.125 17.375,7.125 ; 17.375,7.125 21.65,7.125 ; 21.6,10.95 21.6,7.175 21.65,7.125 ; 21.65,7.125 33.825,7.125 ; 33.825,7.125 36.575,7.125 ; 36.575,7.125 47.725,7.125 ; 47.725,7.125 60.15,7.125 ; 47.725,7.125 47.725,10.65 ; 60.15,7.125 62.65,7.125 ; 62.65,7.125 67,7.125 ; 66.95,10.8 66.95,7.175 67,7.125 ; 67,7.125 79.375,7.125
  other v3: 42.75,8.75
pads on no net: VT1_1. VT1_2. VT1_3. VT1_4. VT2_1. VT2_2. VT2_3. VT2_4. VT3_1. VT3_2. VT3_3. VT3_4. X1_1. X1_2. X1_3. X1_4.

## Polygon pours and split planes (outlines as drawn)
NetC?_4_2 on Top Layer "NETC?_4_2_L01_P012" (solid, pour order 12): 83.75,19.175 83.75,62.375 78,62.375 78,58.35 81.55,58.35 81.55,19.175
NetC?_3_2 on Top Layer "NETC?_3_2_L01_P015" (solid, pour order 15): 64.6,19.3 64.6,62.4 57.95,62.4 57.95,58.275 62.4,58.275 62.4,19.3
NetC?_2_2 on Top Layer "NETC?_2_2_L01_P009" (solid, pour order 9): 38.5,19.175 38.5,62.7 32.275,62.7 32.275,58.1 36.3,58.1 36.3,19.175
NetC?_1_2 on Top Layer "NETC?_1_2_L01_P003" (solid, pour order 3): 19,19 19,62.8 12.825,62.8 12.825,58 16.8,58 16.8,19
GND on Top Layer "GND_L01_P011" (solid, pour order 11): 72.875,23.05 72.875,13.425 80.35,13.425 80.35,55.75 72.875,55.75
no net on Top Layer "NONET_L01_P019" (solid, pour order 19): 40,11
GND on Top Layer "GND_L01_P014" (solid, pour order 14): 53.725,23.525 53.725,13.35 61.2,13.35 61.2,55.675 53.725,55.675
GND on Top Layer "GND_L01_P008" (solid, pour order 8): 27.625,23.35 27.625,13.175 35.1,13.175 35.1,55.5 27.625,55.5
no net on Top Layer "NONET_L01_P002" (solid, pour order 2): 18.3,48.5
no net on Top Layer "NONET_L01_P001" (solid, pour order 1): 18.3,48.5
GND on Top Layer "GND_L01_P000" (solid, pour order 0): 8.125,23.35 8.125,13.175 15.6,13.175 15.6,55.5 8.125,55.5

## Silkscreen, mask and mechanical layers (free items; w line width, h text height)
Border:
  the board outline again, w0.2

## Dimensions
0,0 to 0,63 on Size
0,63 to 85,63 on Size